# Altium PCB Finale_Competition.PcbDoc
Units mm, origin at the board's own origin, x right, y up, seen from the top; angles counter-clockwise.
Board outline 62.86 x 55 mm, 2 copper layers (Top Layer, Bottom Layer); 10 components, 18 nets, 69 pads, 0 vias.
Unrouted connection lines stored in the file: 2.
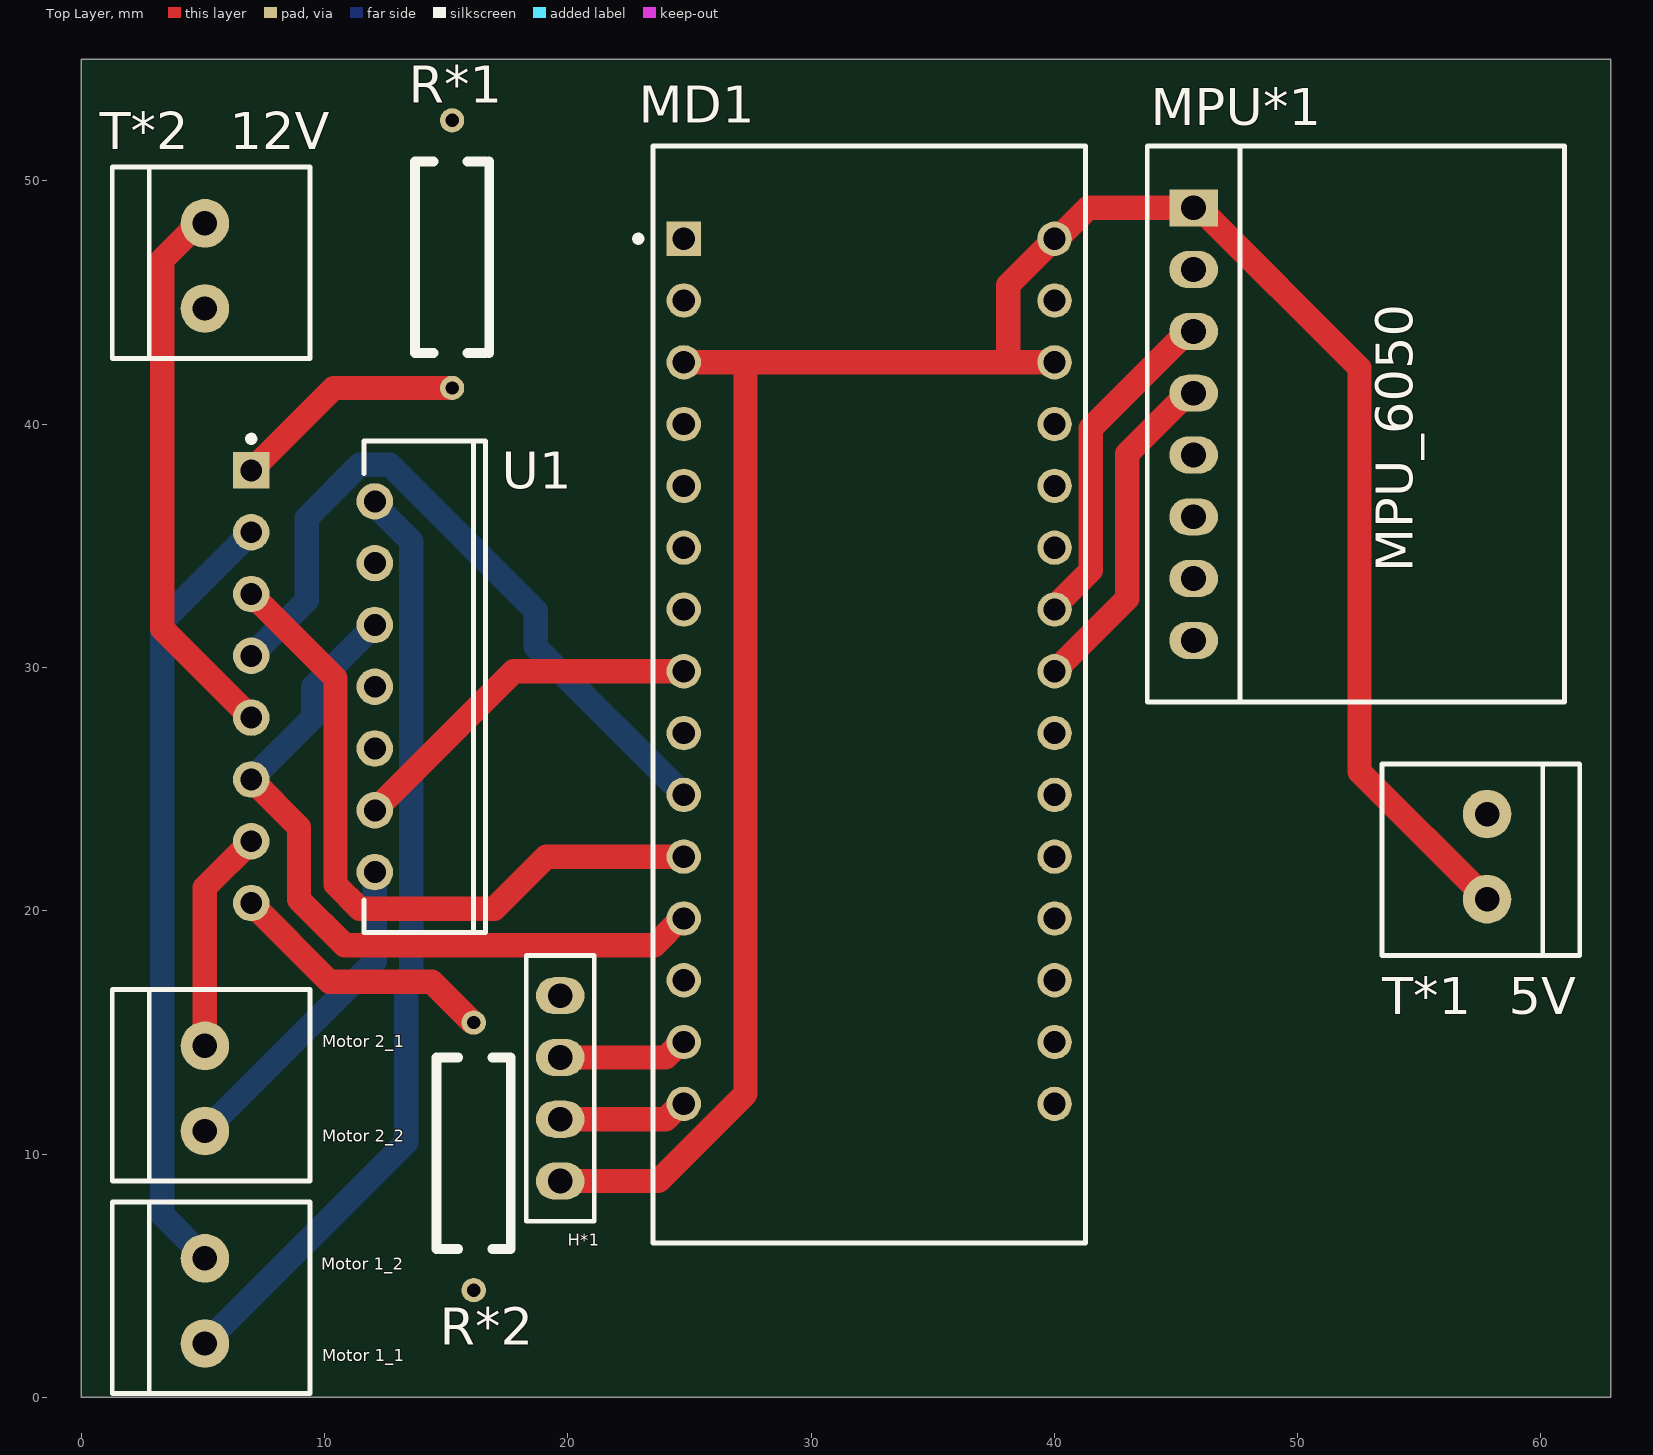
[diagram p0: Top Layer view]
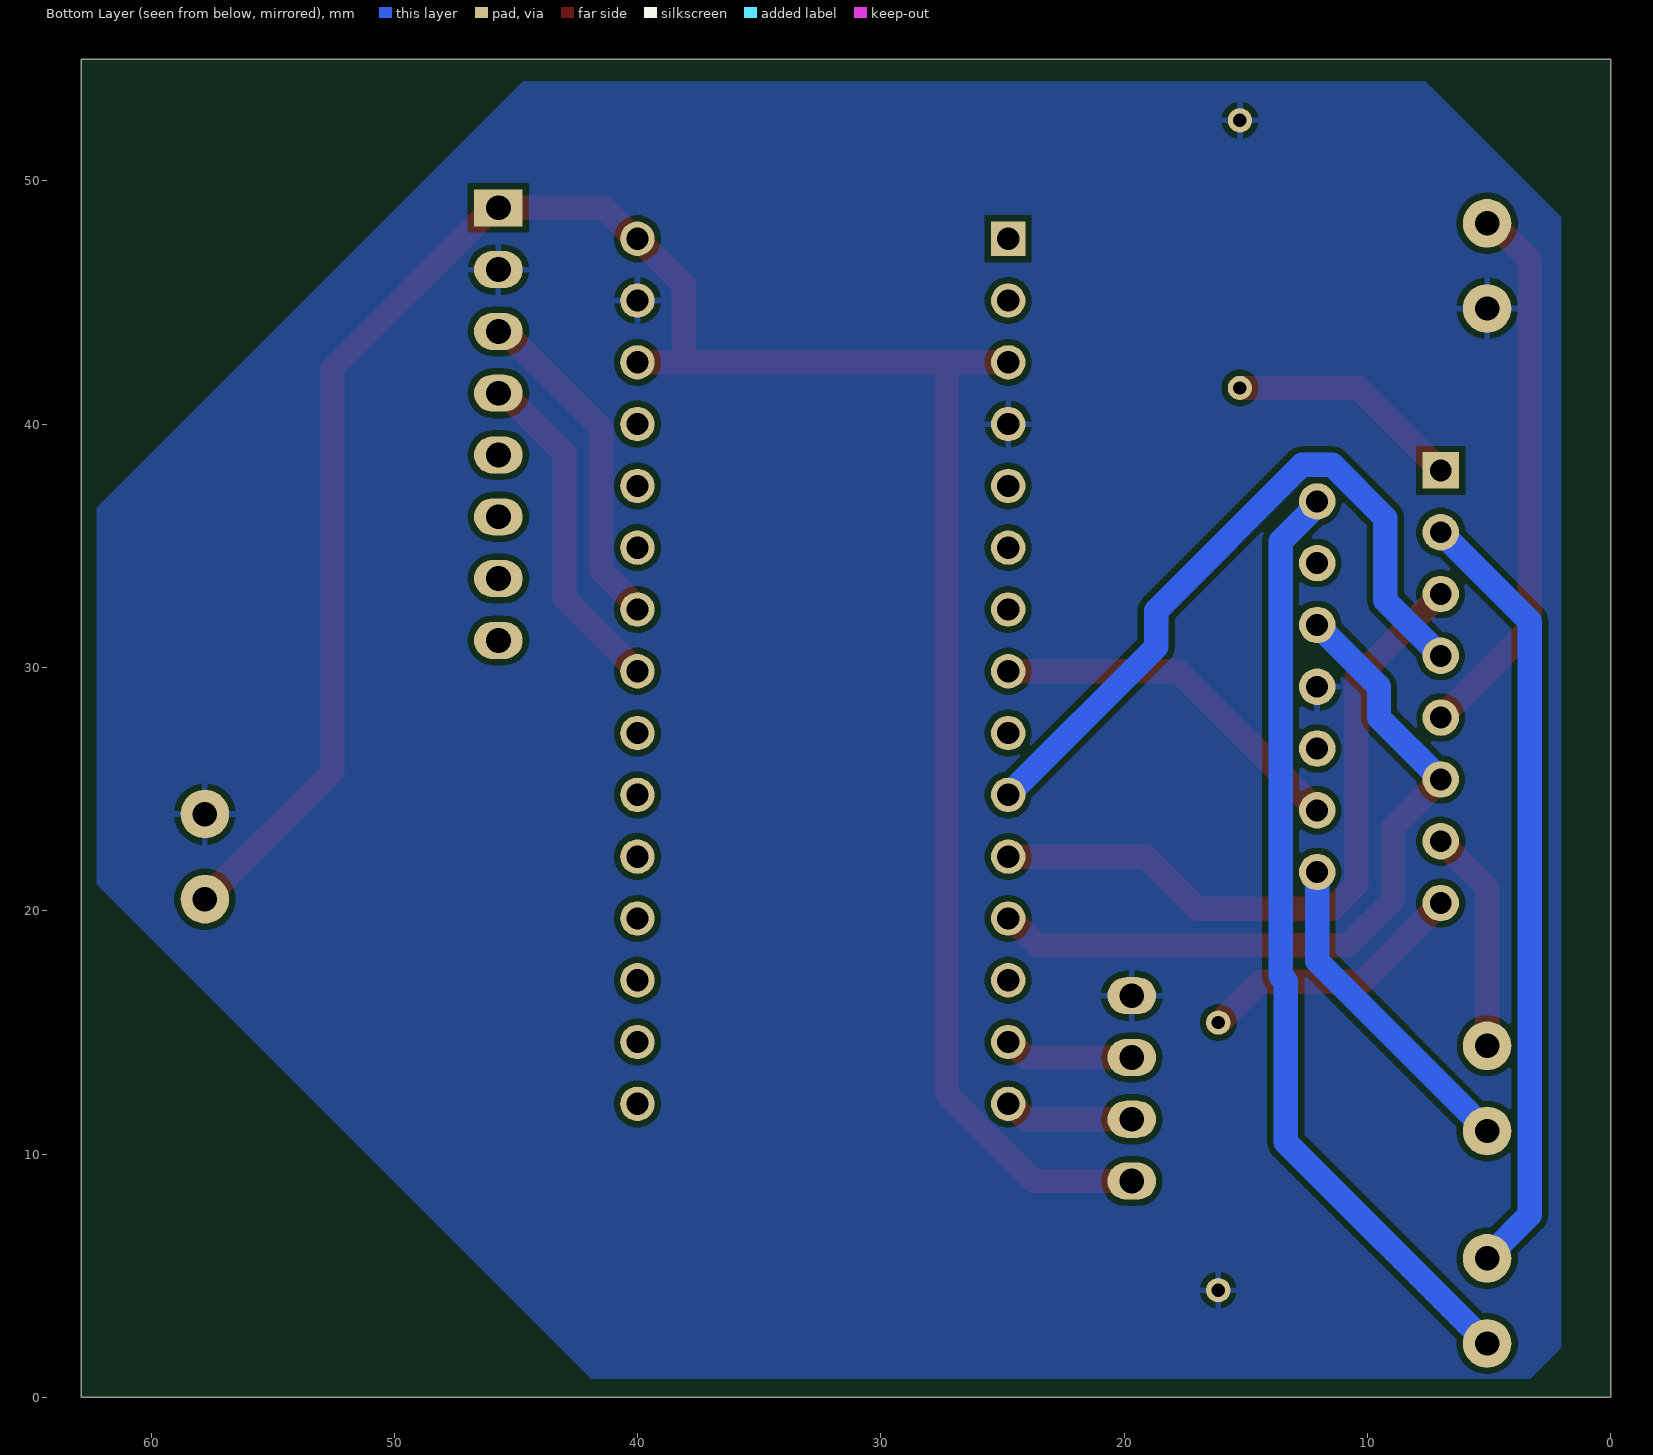
[diagram p1: Bottom Layer view, seen from below]
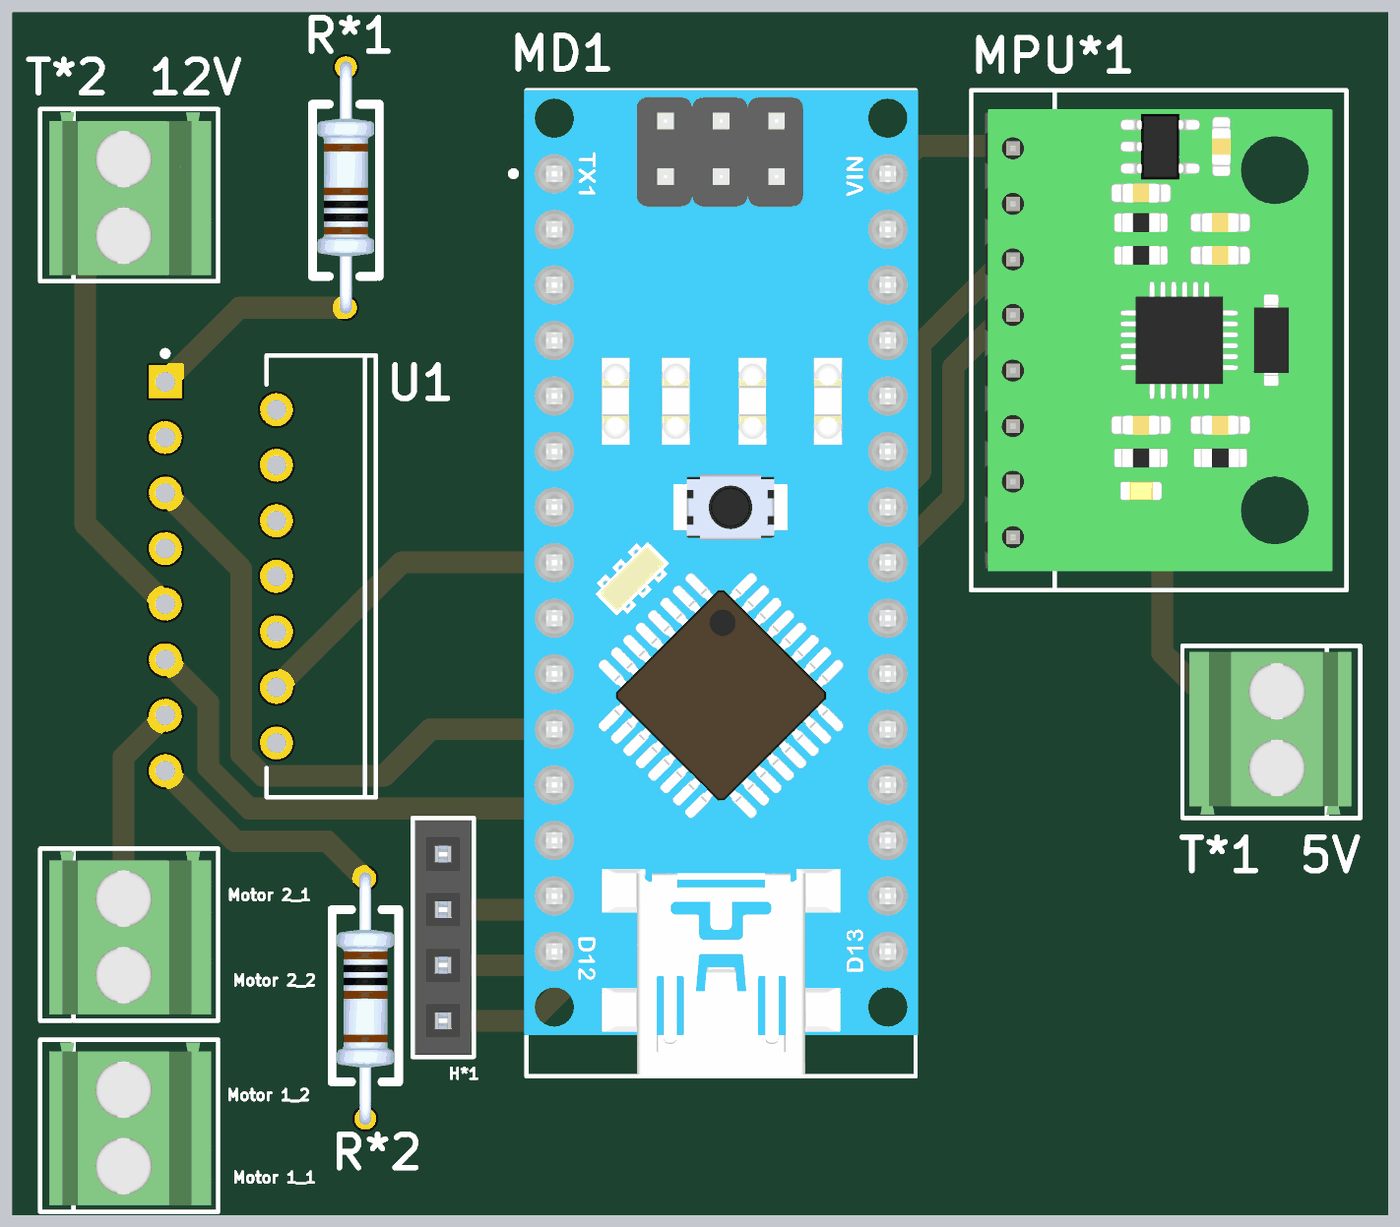
[diagram p2: 3D render of the assembled board from above, using the file's embedded part models]

## Layer stack, top to bottom
Top Solder: solder mask 0.0102, Solder Resist, Dk 3.5
Top Layer: signal copper 0.0356
Dielectric 1: dielectric 0.32, FR-4, Dk 4.8
Bottom Layer: signal copper 0.0356
Bottom Solder: solder mask 0.0102, Solder Resist, Dk 3.5

## Board outline
0,0 62.865,0 62.865,55 0,55

## Design rules (kind name [scope] priority, off if disabled: settings)
Clearance [All] p1: gap=0.25 ignorepadtopadclearanceinfootprint=FALSE except(0.5: Arc-Arc Arc-Track Track-Track)
PolygonConnect [All] p1: connectstyle=Relief reliefconductorwidth=0.254 reliefentries=4 polygonreliefangle="90 Angle" airgapwidth=0.254
RoutingVias [All] p1: holewidth=0.711 width=1.27 viastyle="Through Hole" minholewidth=0.711 minwidth=1.27 maxholewidth=0.711 maxwidth=1.27
SolderMaskExpansion [All] p1: expansion=0.102 istentingtop=FALSE
Width [All] p1: maxlimit=1 minlimit=0.254 preferedwidth=0.254
30 further rules are at their usual default settings.

## Classes and differential pairs
component class Finale_Competition: MD1 R*1 R*2 T*2 U1

## Components (designator, comment, footprint, x,y, rotation, side; value= is the part's Value field where it differs from the comment)
H*1 "FEMALE_HEADER_4" Female_Header_4 19.685,12.7 r90 top
MD1 "A000005" FP-A000005-MFG 32.385,28.892 r0 top
"Motor 1_2" "Terminal_block_2pins_3.5mm" Terminal_block_2pins_3.5mm 5.08,3.965 r270 top (schematic designator T*3)
"Motor 2_1" "Terminal_block_2pins_3.5mm" Terminal_block_2pins_3.5mm 5.08,12.7 r270 top (schematic designator T*4)
MPU*1 "MPU_6050" MPU6050 45.72,40.005 r90 top
R*1 "0.5 Ohm" Resistor 15.24,46.99 r90 top
R*2 "0.5 Ohm" Resistor 16.129,9.906 r270 top
T*1 "Terminal_block_2pins_3.5mm" Terminal_block_2pins_3.5mm 57.785,22.225 r90 top
T*2 "Terminal_block_2pins_3.5mm" Terminal_block_2pins_3.5mm 5.08,46.51 r270 top
U1 "L298N" STM-FM-15 9.525,29.21 r0 top

## Footprints (in the part's own frame and the unit in brackets; to place one, negate y for a bottom-side part, rotate by r counter-clockwise, add the part's x,y. Pads: shape width x height; smd on the part's side, far side on the other; paste and mask are expansions set on the pad)
Female_Header_4 [mil]
  oval 60x78.74 hole 40: 1(-150,0) 2(-50,0) 3(50,0) 4(150,0)
  silkscreen extent -215,-55 215,55, body extent -210,-50 210,50, height 336
FP-A000005-MFG [mil]
  rect 55.67x55.67 hole 35.98 paste-39370.1 mask+0: 1(-300,737.5)
  round 55.67 hole 35.98 paste-39370.1 mask+0: 2(-300,637.5) 3(-300,537.5) 4(-300,437.5) 5(-300,337.5) 6(-300,237.5) 7(-300,137.5) 8(-300,37.5) 9(-300,-62.5) 10(-300,-162.5) 11(-300,-262.5) 12(-300,-362.5) 13(-300,-462.5) 14(-300,-562.5) 15(-300,-662.5) 16(300,-662.5) 17(300,-562.5) 18(300,-462.5) 19(300,-362.5) 20(300,-262.5) 21(300,-162.5) 22(300,-62.5) 23(300,37.5) 24(300,137.5) 25(300,237.5) 26(300,337.5) 27(300,437.5) 28(300,537.5) 29(300,637.5) 30(300,737.5)
  silkscreen extent -379,-888 350,888, body extent -354,-891 354,891, height 10
MPU6050 [mm]
  oval 1.524x2 hole 1.02: ADO(-6.35,0) GND(6.35,0) INT(-8.89,0) SCL(3.81,0) SDA(1.27,0) XCL(-3.81,0) XDA(-1.27,0)
  rect 1.524x2 hole 1.02: VCC(8.89,0)
  silkscreen extent -11.43,-15.24 11.43,1.91, body extent -10.55,-14.6 10.55,1.27, height 14.64
Resistor [mm]
  round 1 hole 0.55: 1(-5.5,0) 2(5.5,0)
  silkscreen extent -4.06,-1.52 3.81,1.52, body extent -5.77,-1.29 5.77,1.29, height 2.6
STM-FM-15 [mm] "FM, 15-Leads, Body 20.2x5mm, Pitch 1.27mm"
  rect 1.5x1.5 hole 0.9: 1(-2.54,8.89)
  round 1.5 hole 0.9: 2(2.54,7.62) 3(-2.54,6.35) 4(2.54,5.08) 5(-2.54,3.81) 6(2.54,2.54) 7(-2.54,1.27) 8(2.54,0) 9(-2.54,-1.27) 10(2.54,-2.54) 11(-2.54,-3.81) 12(2.54,-5.08) 13(-2.54,-6.35) 14(2.54,-7.62) 15(-2.54,-8.89)
  silkscreen extent -2.66,-10.1 7.09,10.31, body extent -2.8,-10.1 7.09,10.1, height 21
Terminal_block_2pins_3.5mm [mm]
  round 2 hole 1: 1(-1.75,0) 2(1.75,0)
  silkscreen extent -4.06,-3.81 3.81,4.32, body extent -3.93,-3.4 3.52,4, height 8.51

## Part data
MD1: library part CMP-189986-000002-1, "ARDUINO NANO ATMEGA328 EVAL BRD", Operating Supply Voltage=12V, Package Quantity=50, Core Architecture=AVR, Data Bus Width=8b, Evaluation Kit=Yes, Height=0.25inch, Interface=I2C, Length=7inch, Number of Bits=8, Packaging=Bulk, REACH SVHC="No SVHC", Series="AVR® ATmega", Weight=0.358383oz, Width=5inch
R*1 R*2: library part Resistor
U1: library part CMP-2000-06526-1, "Dual Full-Bridge Driver, 4.8 to 46 V, -40 to 150 degC, 15-Pin FM (MW 15L), RoHS, Tube", Driver Case Style=Multiwatt, Manufacturer=STMicroelectronics, Operating Temperature Max=130°C, Operating Temperature Min=-25°C, Output Current=2A, Output Voltage=46V, Package Description="15-Pin Flange Mount, Body 5 x 19.6 mm, Pitch 1.27 mm", Package Reference=FM-15, PartNumber=L298, Supply Voltage Max=7V, Supply Voltage Min=4.5V, Automotive Qualification Standard=-, Datasheet URL=https://datasheet.ciiva.com/15109/getdatasheetpartid-50682-15109332.pdf, Datasheet Version=01/2000, Manufacturer URL=http://www.st.com/, Motor Type=FullBridge, Mounting Technology=ThroughHole, MSL=-, No. of Outputs=4Outputs, No. of Pins=15Pins, Packaging=Each, Product Range=-, SVHC=NoSVHC(17-Dec-2015)

## Nets (pads, with @x,y where several pads share a name; then routed paths per layer and width w, separated by ;. In a path a pad name is that pad's centre, name@x,y a point inside that pad or via, vN(x,y) a via of type N, cw(c..) or ccw(c..) an arc to the next point about the centre after c; other vN are vias at no path point)
+5: H*1.1 MD1.3 MD1.28 MD1.30 MPU*1.VCC T*1.1 | length 100.2
  Top Layer w1: H*1.1 23.711,8.89 27.305,12.484 27.305,42.545 ; MD1.3 27.305,42.545 ; MD1.28 38.1,42.545 ; T*1.1@57.846,20.414 52.542,25.718 52.542,42.311 45.958,48.895 MPU*1.VCC 41.387,48.895 40.117,47.625 MD1.30 38.1,45.72 38.1,42.545 ; 27.305,42.545 38.1,42.545
+12: T*2.1 U1.9 | length 22.7
  Top Layer w1: T*2.1 4.826,48.26 3.33,46.764 3.33,31.595 U1.9
COMMON_ENABLE: MD1.12 U1.6 U1.11 | length 31.2
  Top Layer w1: U1.11 8.952,23.433 8.952,20.461 10.822,18.59 23.558,18.59 24.653,19.685 MD1.12
  Bottom Layer w1: U1.11 9.525,27.94 9.525,29.21 U1.6
ECHO: H*1.3 MD1.14 | length 5.3
  Top Layer w1: H*1.3 24.018,13.97 24.653,14.605 MD1.14
GND: H*1.4 MD1.4 MD1.29 MPU*1.GND R*1.2 R*2.2 T*1.2 T*2.2 U1.8
IN1_1: MD1.11 U1.5 | length 29
  Top Layer w1: U1.5 10.452,29.553 10.452,21.082 11.444,20.09 16.981,20.09 19.116,22.225 MD1.11
IN1_2: MD1.10 U1.7 | length 29.5
  Bottom Layer w1: U1.7 9.262,32.757 9.262,36.148 11.444,38.33 12.686,38.33 18.686,32.33 18.686,30.844 MD1.10
IN2_1: MD1.9 U1.10
IN2_2: MD1.8 U1.12 | length 15.1
  Top Layer w1: U1.12 17.78,29.845 MD1.8
"Motor 1_1": "Motor 1_2.2" U1.2 | length 38.8
  Bottom Layer w1: 5.08,2.215 13.355,10.49 13.355,17.104 13.565,17.314 13.565,35.195 12.065,36.695 U1.2
"Motor 1_2": "Motor 1_2.1" U1.3 | length 32.1
  Bottom Layer w1: 5.08,5.715 5.08,5.751 3.33,7.501 3.33,31.905 U1.3
"Motor 2_1": "Motor 2_1.1" U1.13 | length 9.2
  Top Layer w1: 5.08,14.45 5.08,20.955 U1.13
"Motor 2_2": "Motor 2_1.2" U1.14 | length 13.5
  Bottom Layer w1: 5.08,10.95 12.065,17.935 U1.14
NetR*1_1: R*1.1 U1.1 | length 9.7
  Top Layer w1: U1.1 10.375,41.49 R*1.1
NetR*2_1: R*2.1 U1.15 | length 11.1
  Top Layer w1: U1.15 6.985,20.306 10.201,17.09 14.406,17.09 R*2.1@16.056,15.44
SCL: MD1.24 MPU*1.SCL | length 13.9
  Top Layer w1: MD1.24 40.005,32.497 41.498,33.99 41.498,39.831 45.482,43.815 MPU*1.SCL
SDA: MD1.23 MPU*1.SDA | length 13.9
  Top Layer w1: MD1.23 42.998,32.838 42.998,38.791 45.482,41.275 MPU*1.SDA
TRIG: H*1.2 MD1.15 | length 5.3
  Top Layer w1: H*1.2 24.018,11.43 24.653,12.065 MD1.15
pads on no net: MD1.1 MD1.2 MD1.5 MD1.6 MD1.7 MD1.13 MD1.16 MD1.17 MD1.18 MD1.19 MD1.20 MD1.21 MD1.22 MD1.25 MD1.26 MD1.27 MPU*1.ADO MPU*1.INT MPU*1.XCL MPU*1.XDA U1.4

## Polygon pours and split planes (outlines as drawn)
GND on Bottom Layer "GND_L02_P000" (solid, remove dead copper, pour order 0): 62.23,21.082 41.91,0.762 3.302,0.762 2.032,2.032 2.032,48.514 7.62,54.102 44.704,54.102 62.23,36.576

## Silkscreen, mask and mechanical layers (free items; w line width, h text height)
Top Overlay:
  text "12V" at 6.096,51.308 h1.52
  text "5V" at 58.674,15.748 h1.52
  text "Motor 2_2" at 9.906,10.497 h0.5
  text "Motor 1_1" at 9.906,1.48 h0.5